# EAGLE board balloon-v05 (EAGLE 7.6.0)
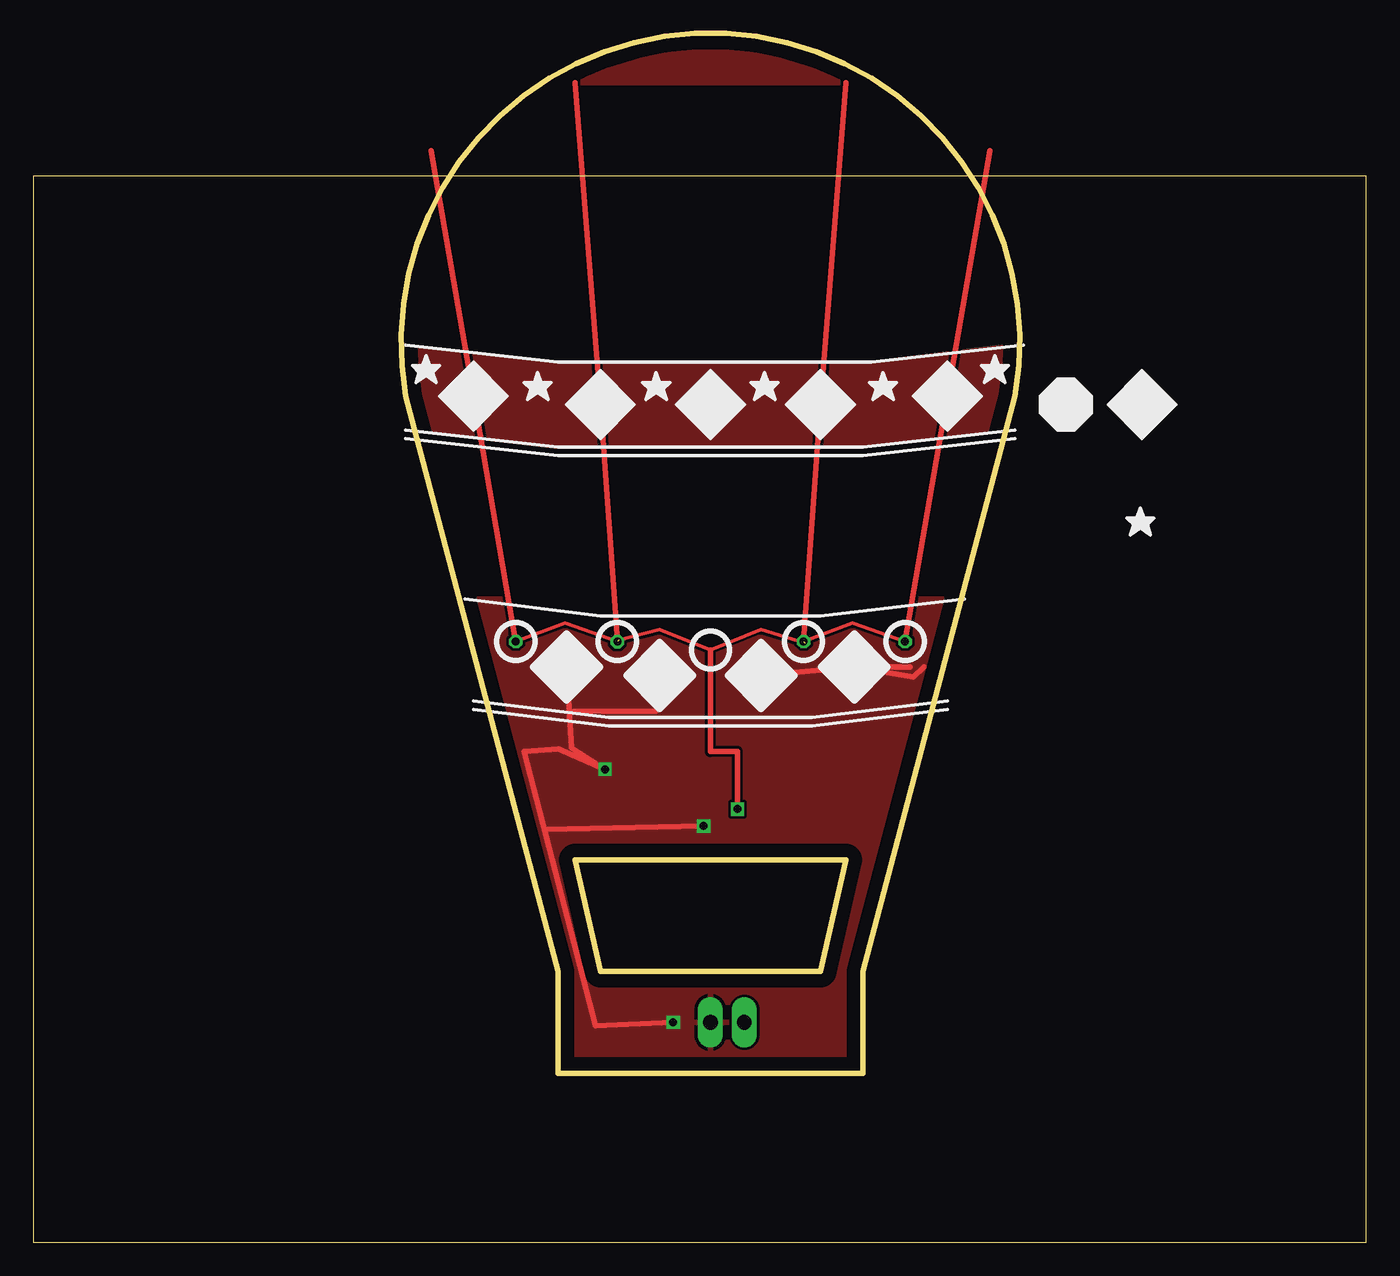
[diagram p0: board, top side]
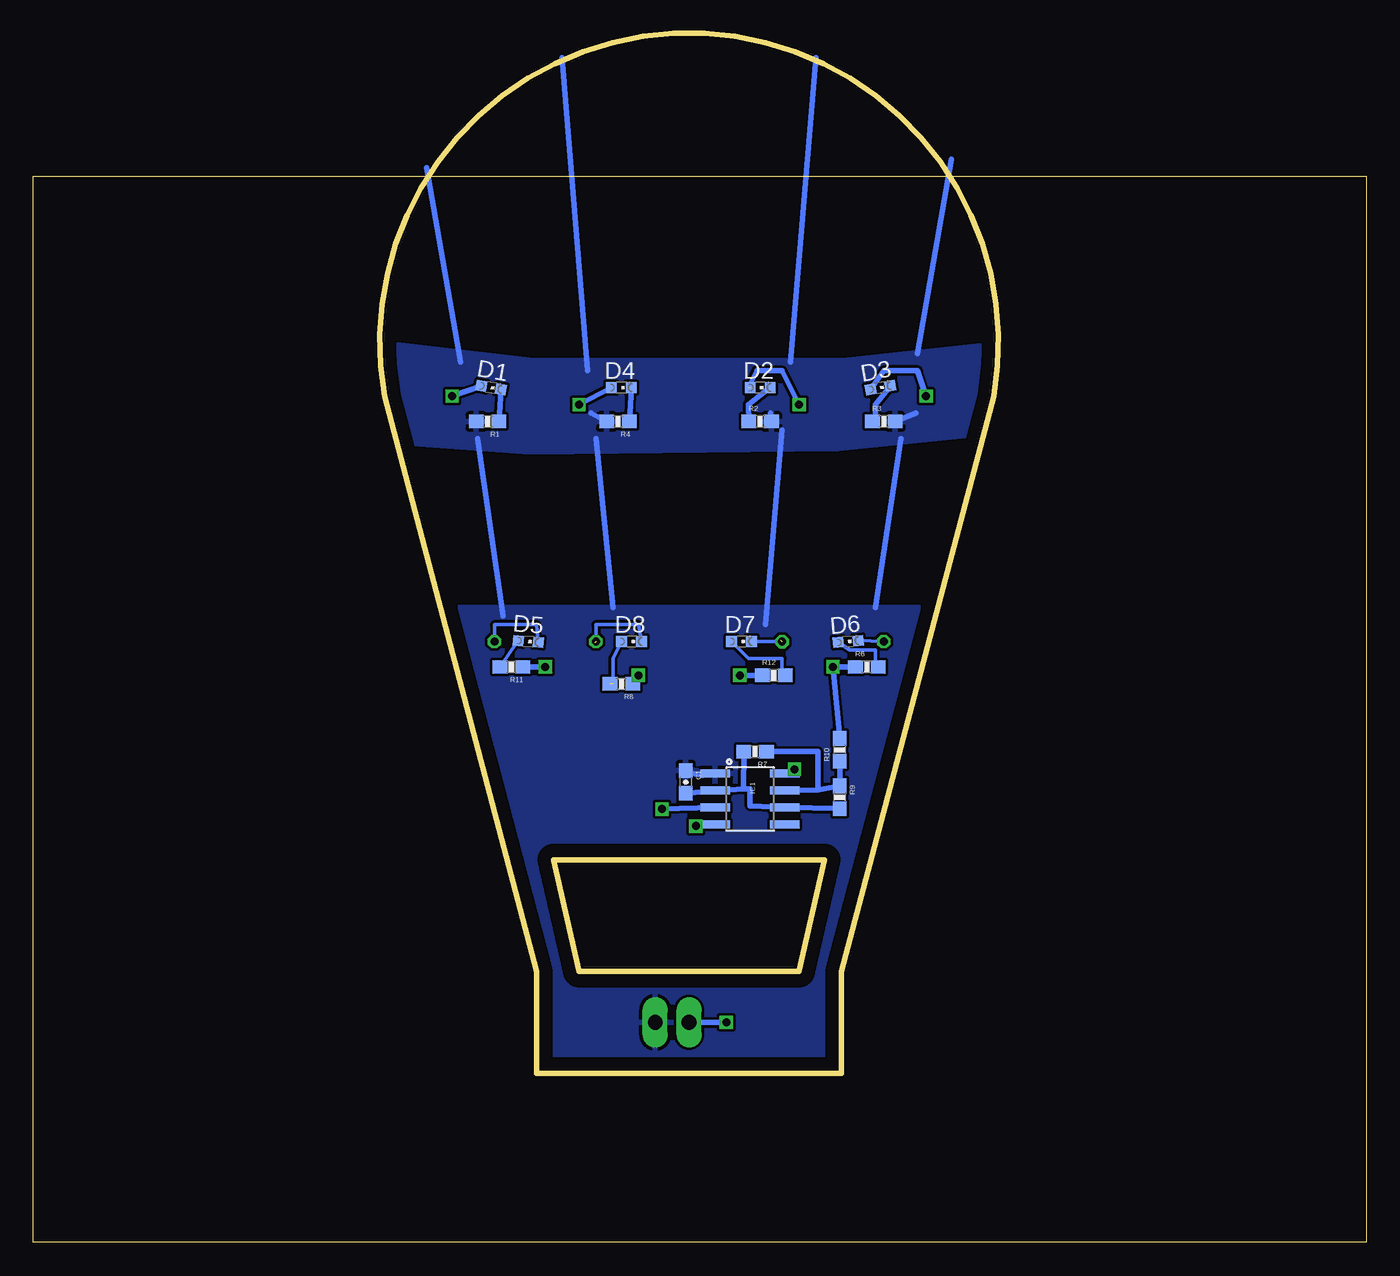
[diagram p1: board, bottom side, seen from below]

Size 100 x 90.72 mm. Coordinates in mm from the lower left corner, seen from the top.
Outline: 0,0 100,0 100,80 0,80 0,0
Outline: 27.94,63.5 arc-200 73.66,63.5 62.23,20.32 62.23,12.7 39.37,12.7 39.37,20.32 27.94,63.5
Outline: 40.64,28.7 42.55,20.32 59.05,20.32 60.96,28.7 40.64,28.7
Copper layers (1*16): Top 0.035mm / dielectric 1.5mm / Bottom 0.035mm
Design rules "default": minimum track width 10mil, minimum drill 24mil, track to track 8mil, track to pad 8mil, pad to pad 8mil, via to via 8mil, smd to smd 8mil, copper to edge 40mil, drill to drill 8mil, minimum pad ring 10mil, minimum via ring 8mil, stop-mask expansion 4mil, vias tented up to drill 0mil, thermal gap 10mil
tKeepout: area 29.5,48.8 to 35.1,59.7; area 35.8,48 to 43.2,58.9; area 44.5,48 to 57.1,58.7; area 58.4,48 to 66,59.2; area 69.6,67.3 to 73.7,77.5; area 59.9,66.5 to 69.8,86.6; area 41.9,66.5 to 59.7,86.6; area 31.8,66.5 to 41.9,86.6; area 27.9,67.3 to 32,77.7; area 66.5,48.8 to 72.1,59.7

## Footprints (pad centres in the part's own frame; a part is rotated, then mirrored left to right if it is on the bottom)
0603-CAP = smd 1.1 x 1: 1 -0.85,0; 2 0.85,0
CHIPLED_0603 = smd 0.8 x 0.8: A 0,-0.75; C 0,0.75
CR2032-SMD = smd 5.08 x 5.08: +$1 -12.7,0; +$2 12.7,0 | smd 4.064 x 4.064: - 0,0
SO08 = smd 0.61 x 2.21: 1 -1.905,-2.616; 2 -0.635,-2.616; 3 0.635,-2.616; 4 1.905,-2.616; 5 1.905,2.616; 6 0.635,2.616; 7 -0.635,2.616; 8 -1.905,2.616
1X02_LONGPADS = drill 1.118 pad 1.88 long: 1 0,0; 2 2.54,0
0603-RES = smd 1.1 x 1: 1 -0.85,0; 2 0.85,0
SWITCH-SPST-SMD-A = smd 0.7 x 1.5: 1 -2.25,-1.75; 2 -0.75,-1.75; 3 2.25,-1.75 | smd 1 x 0.6: GND1 -3.65,1; GND3 3.65,1 | smd 1 x 0.8: GND2 -3.65,-1.1; GND4 3.65,-1.1 | hole 0.9: -1.5,0; 1.5,0

## Placement (x,y rotation side)
C1  1UF  [0603-CAP]  51.05,34.54 270 bottom
D1  UV-30mA  [CHIPLED_0603]  65.66,64.14 260 bottom
D2  UV-30mA  [CHIPLED_0603]  45.47,64.14 270 bottom
D3  UV-30mA  [CHIPLED_0603]  36.45,64.14 280 bottom
D4  UV-30mA  [CHIPLED_0603]  55.88,64.14 270 bottom
D5  UV-30mA  [CHIPLED_0603]  62.87,45.09 265 bottom
D6  UV-30mA  [CHIPLED_0603]  38.86,45.09 275 bottom
D7  UV-30mA  [CHIPLED_0603]  46.86,45.09 270 bottom
D8  UV-30mA  [CHIPLED_0603]  55.12,45.09 270 bottom
G1  [CR2032-SMD]  -29.21,11.43 0 top  (outside the outline)
G2  [CR2032-SMD]  -29.21,34.29 0 top  (outside the outline)
IC1  [SO08]  46.23,33.27 270 bottom
J1  [1X02_LONGPADS]  50.8,16.51 0 top
R1  100  [0603-RES]  65.91,61.59 180 bottom
R2  100  [0603-RES]  45.47,61.59 0 bottom
R3  100  [0603-RES]  36.2,61.59 0 bottom
R4  100  [0603-RES]  56.13,61.59 180 bottom
R6  100  [0603-RES]  37.47,43.18 0 bottom
R7  SET  [0603-RES]  45.85,36.83 180 bottom
R8  100  [0603-RES]  55.88,41.91 180 bottom
R9  1M  [0603-RES]  39.5,33.4 270 bottom
R10  1k  [0603-RES]  39.5,36.96 90 bottom
R11  100  [0603-RES]  64.14,43.18 180 bottom
R12  100  [0603-RES]  44.45,42.55 0 bottom
S1  [SWITCH-SPST-SMD-A]  -31.75,58.42 0 top  (outside the outline)

## Library data of the parts
C1 = SparkFun-Capacitors; DIGIKEY_PART_ID: 1276-1946-1-ND
D1-D8 = led
G1 G2 = adafruit; DIGIKEY_PART_ID: BK-913-ND
IC1 = SparkFun-AnalogIC; DIGIKEY_PART_ID: ICM7555CBAZ-TCT-ND
J1 = SparkFun-Connectors
R1-R4 R6 R8 R11 R12 = SparkFun-Resistors; DIGIKEY_PART_ID: P100BZCT-ND
R7 R9 = SparkFun-Resistors; DIGIKEY_PART_ID: P1MBZCT-ND
R10 = SparkFun-Resistors; DIGIKEY_PART_ID: P1KBZCT-ND
S1 = SparkFun-Electromechanical; DIGIKEY_PART_ID: 679-1847-1-ND; PROD_ID: SWCH-10651

## Nets
DISCHARGE: IC1.7 R7.1 R9.1 R10.1
GND: C1.1 IC1.1 J1.2 R1.2 R2.2 R3.2 R4.2
N$1: D8.A R8.2
N$2: D5.A R11.2
N$3: D1.C R1.1
N$4: D7.A R12.2
N$5: D2.C R2.1
N$6: D6.A R6.2
N$7: D3.C R3.1
N$9: D4.C R4.1
OUT: D1.A D2.A D3.A D4.A D5.C D6.C D7.C D8.C IC1.3
THRESHOLD: C1.2 IC1.2 IC1.6 R7.2 R9.2
VCC: IC1.4 IC1.8 J1.1 R6.1 R8.1 R10.2 R11.1 R12.1

## Tracks (layer width: path | path; a pad name or v marks a point on that pad's centre or on a via)
DISCHARGE
  Bottom 0.406: R10.1 R9.1 41.14,33.96 | IC1.7 41.14,33.96 | R7.1 41.15,36.83 41.14,33.96
GND
  Bottom 0.406: R3.2 33.78,62.23 | R2.2 44.7,62.23 | R4.2 58.17,62.23 | 49.78,35.05 51.05,35.31 | 64.77,46.99 66.67,60.33 | 56.52,47.62 57.78,60.33 | 45.09,46.35 43.81,60.96 | 36.83,47.62 34.92,60.33 | 33.66,66.67 31.11,81.28 | 43.18,66.04 41.27,88.9 | 58.42,65.41 60.33,88.9 | 67.94,66.04 70.48,80.64
  pour Bottom: 27.43,67.44 39.24,66.17 62.48,66.17 75.69,67.69 73.66,60.07 62.74,59.31 39.62,59.56 28.19,60.71 27.43,67.06
  pour Bottom: 33.02,47.62 68.58,47.62 69.85,46.35 63.5,12.06 38.1,12.06 30.48,46.35
N$1  (1 unrouted)
  Bottom 0.254: 56.52,41.91 56.52,43.81 D8.A
N$2
  Bottom 0.254: R11.2 64.14,44.45 D5.A
N$3
  Bottom 0.406: R1.1 D1.C
N$4
  Bottom 0.254: R12.2 43.81,42.55 43.81,43.81 46.35,43.81 D7.A
N$5
  Bottom 0.406: R2.1 46.35,62.87 D2.C
N$6
  Bottom 0.254: R6.2 36.83,43.18 36.83,44.45 38.73,44.45 D6.A
N$7
  Bottom 0.406: R3.1 36.83,61.59 36.83,62.87 D3.C
N$8
  pour Top: 27.43,67.31 39.37,66.04 62.99,66.04 75.18,67.56 73.66,60.96 62.23,59.69 39.12,59.69 28.19,60.96
N$9
  Bottom 0.406: R4.1 D4.C
N$11
  pour Top: 38.1,87 63.5,87 57.78,90.81 50.16,91.44 42.55,90.17
OUT  (via drill 0.6)  (4 unrouted)
  Top 0.254: v36.2,45.09 39.88,46.48 v43.81,45.07 | v57.78,45.09 61.47,46.48 v65.41,45.09 | 43.94,45.21 46.99,45.97 50.8,44.45 54.61,45.97 57.91,44.96
  Top 0.406: v43.81,45.07 v42.55,62.87 | v36.2,45.09 v33.02,63.5 29.84,81.92 | v65.41,45.09 v68.58,63.5 71.75,81.92 | v52.83,32.51 52.82,36.85 50.8,36.83 50.8,44.45 | v57.78,45.09 v59.05,62.87 60.96,87 | 42.55,62.85 40.64,87
  Bottom 0.254: D6.C v36.2,45.09 | D5.C 62.23,46.35 65.41,46.35 v65.41,45.09 | D8.C 54.61,46.35 57.78,46.35 v57.78,45.09 | D7.C v43.81,45.07
  Bottom 0.406: IC1.3 v52.83,32.51 | v68.58,63.5 D1.A | D4.A v59.05,62.87 | 46.35,64.14 45.72,65.41 43.81,65.41 v42.55,62.87 | v33.02,63.5 33.66,65.41 36.2,65.41 D3.A
THRESHOLD
  Bottom 0.406: 46.46,34.02 46.23,34.04 46.23,32.77 IC1.6 R9.2 | 46.46,34.02 IC1.2 C1.2 | 46.46,34.02 46.74,34.04 R7.2
VCC  (via drill 0.6)
  Top 0.406: v48.01,16.51 42.16,16.26 38.48,30.51 | 38.48,30.51 38.35,30.99 v50.29,31.24 | 38.48,30.51 36.83,36.83 39.41,37.01 v42.89,35.5 40.39,37.08 v40.01,43.18 | v46.99,42.55 46.74,39.88 40.51,39.84 | v54.61,42.55 v61.59,43.18 | v61.59,43.18 65.79,43.18 | v61.59,43.18 66.04,42.42 66.8,43.18
  Bottom 0.406: J1.1 v48.01,16.51 | v50.29,31.24 IC1.4 | R12.1 v46.99,42.55 | IC1.8 v42.89,35.5 | R6.1 v40.01,43.18 R10.2 | R8.1 v54.61,42.55 | R11.1 v61.59,43.18
  pour Top: 30.48,48.26 71.12,48.26 66.04,8.89 30.48,11.43
(copper drawn outside any net)
  shapes: Bottom circle x1